# Altium PCB 转接板1ASCII.PcbDoc
Units mm, origin at the board's own origin, x right, y up, seen from the top; angles counter-clockwise.
Board outline 46 x 46 mm, 2 copper layers (Top Layer, Bottom Layer); 5 components, 7 nets, 54 pads, 0 vias.
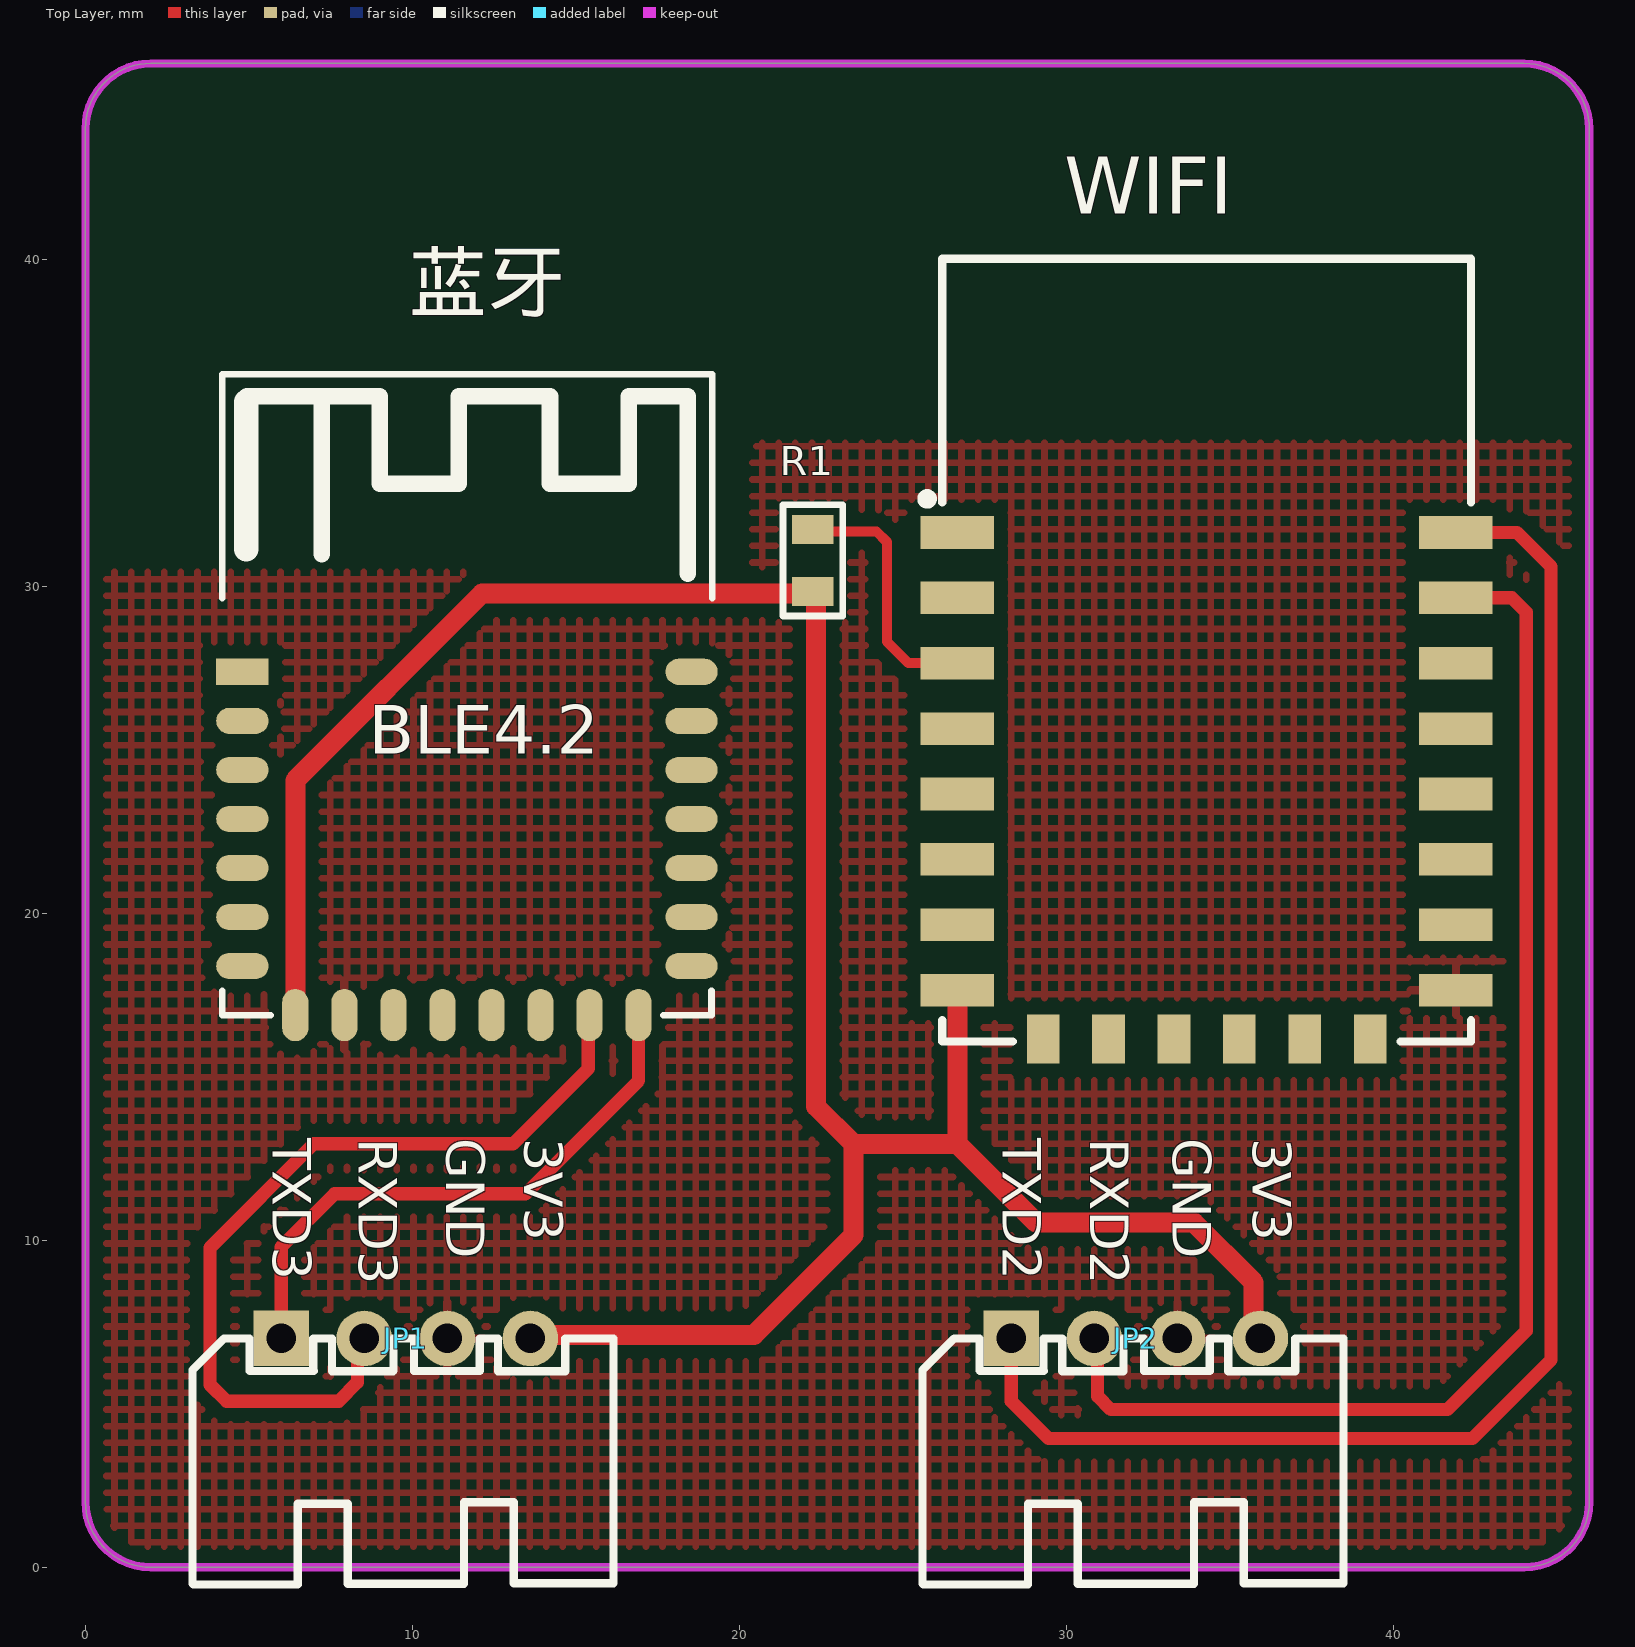
[diagram p0: Top Layer view]
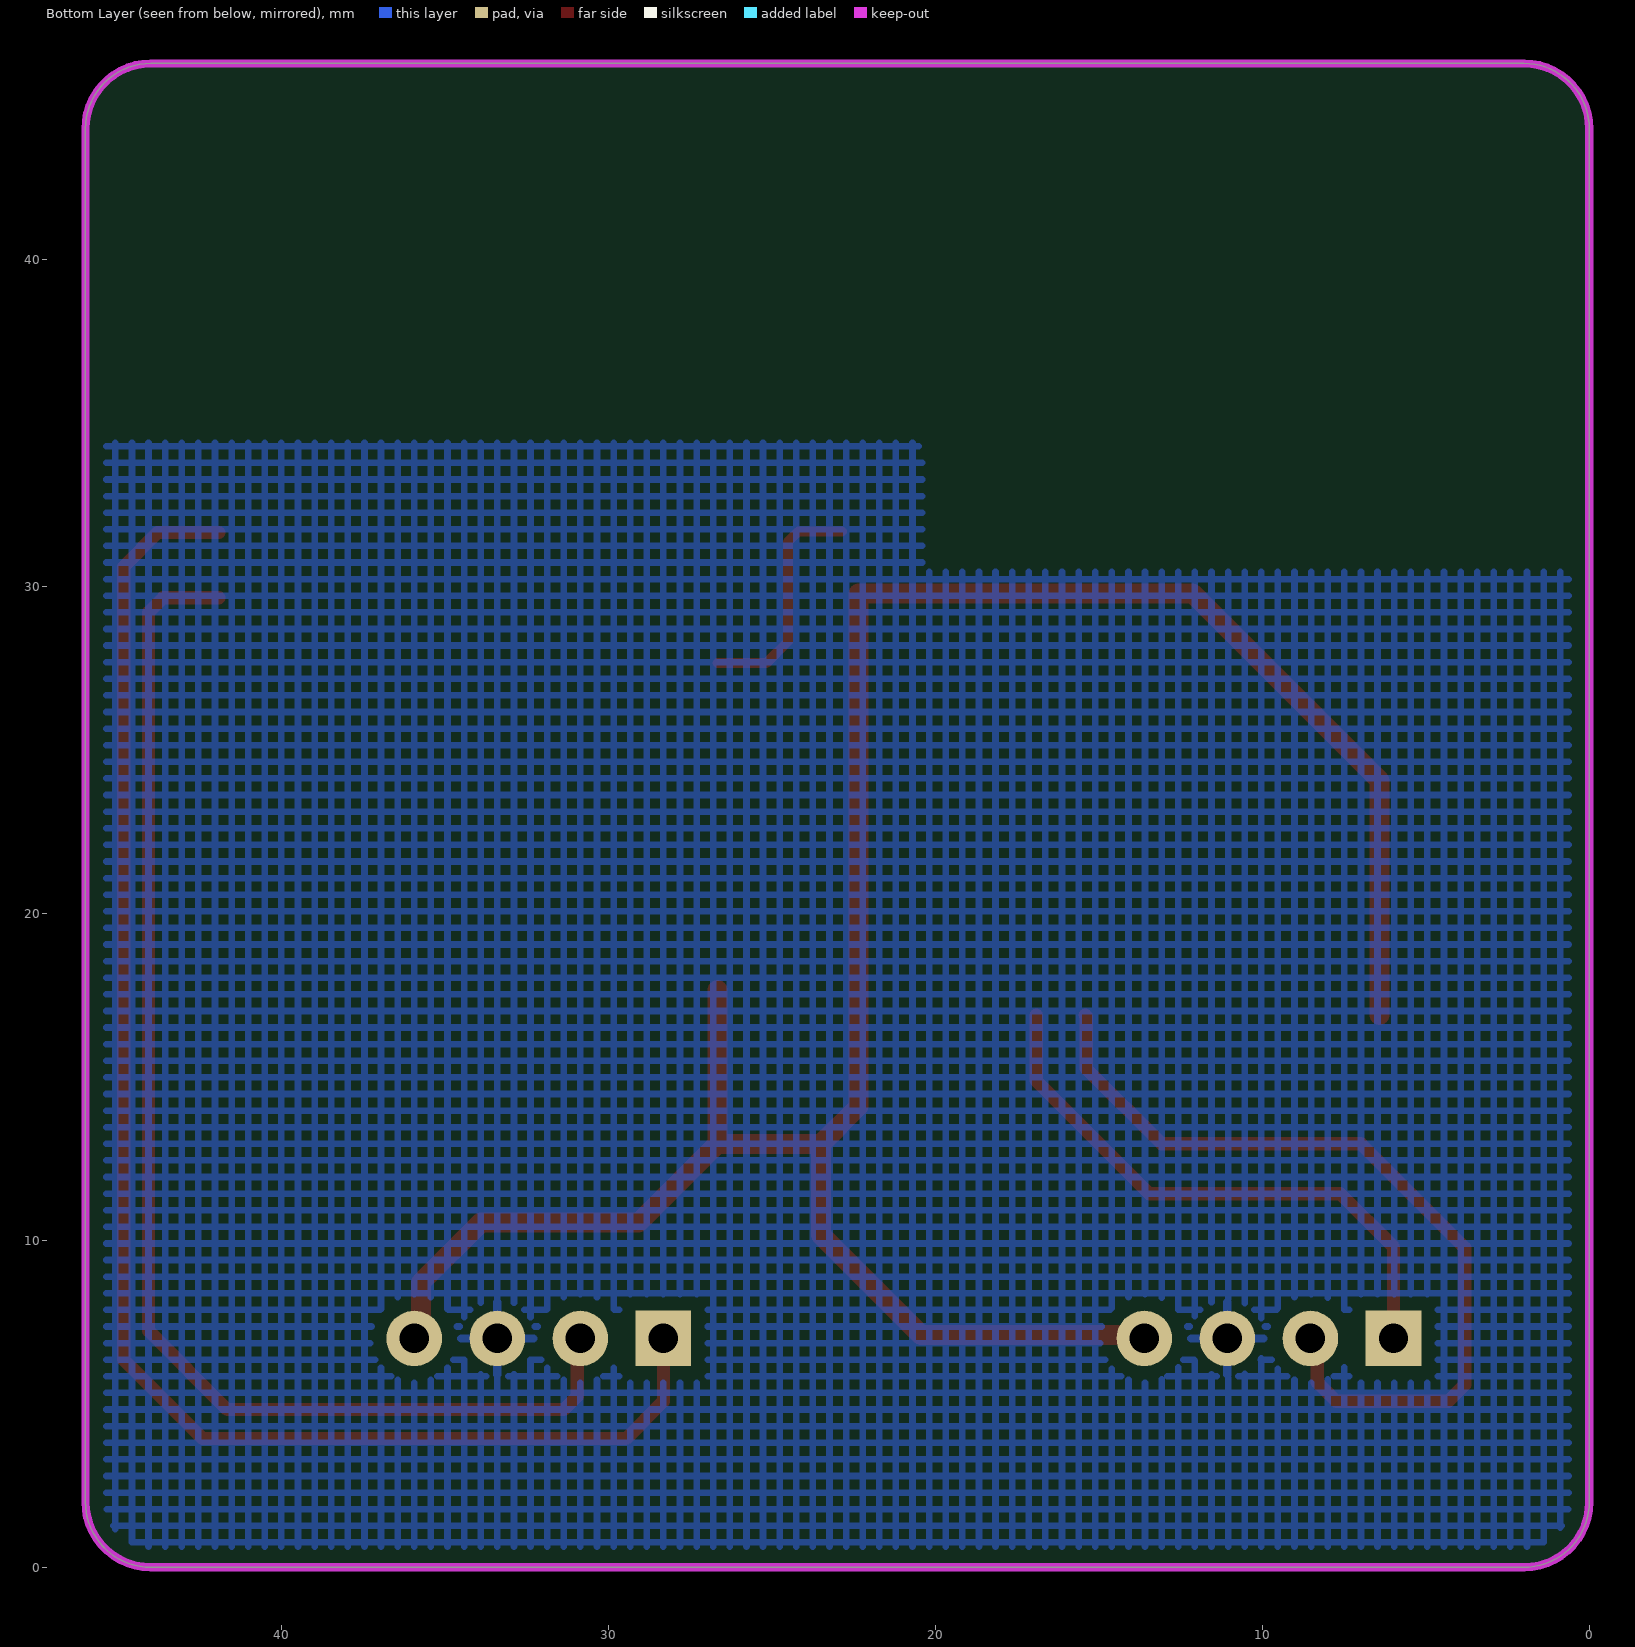
[diagram p1: Bottom Layer view, seen from below]

## Layer stack, top to bottom
Top Solder: solder mask 0.0102, Solder Resist, Dk 3.5
Top Layer: signal copper 0.0356
Dielectric 1: dielectric 0.32, FR-4, Dk 4.8
Bottom Layer: signal copper 0.0356
Bottom Solder: solder mask 0.0102, Solder Resist, Dk 3.5

## Board outline
0,2 ccw(c2,2) 2,0 44,0 ccw(c44,2) 46,2 46,44 ccw(c44,44) 44,46 2,46 ccw(c2,44) 0,44

## Design rules (kind name [scope] priority, off if disabled: settings)
AssemblyTestPointUsage [All] p0: scope1count=1 scope1_0_kind=Board scope1_0_value=Board scope2count=1 scope2_0_kind=Board scope2_0_value=Board commentlength=0
AssemblyTestpoint [All] p0: scope1count=1 scope1_0_kind=Board scope1_0_value=Board scope2count=1 scope2_0_kind=Board scope2_0_value=Board commentlength=0
Clearance Clearance_1 [All] p0 off: scope1count=1 scope1_0_kind=Board scope1_0_value=Board scope2count=1 scope2_0_kind=Board scope2_0_value=Board commentlength=48 gap=0.406 // Protel DXP Scope 1 Expression Was: InPolygon
Clearance [All] p0: scope1count=1 scope1_0_kind=Board scope1_0_value=Board scope2count=1 scope2_0_kind=Board scope2_0_value=Board commentlength=0 gap=0.203
Clearance Clearance_1 [InPolygon] p1: gap=0.406 ignorepadtopadclearanceinfootprint=FALSE
Clearance [All] p2: gap=0.203 ignorepadtopadclearanceinfootprint=FALSE
ComponentClearance [All] p0: scope1count=1 scope1_0_kind=Board scope1_0_value=Board scope2count=1 scope2_0_kind=Board scope2_0_value=Board commentlength=0 gap=0.254 collisioncheckmode=3
DiffPairsRouting [All] p0: scope1count=1 scope1_0_kind=Board scope1_0_value=Board scope2count=1 scope2_0_kind=Board scope2_0_value=Board commentlength=0
FabricationTestPointUsage [All] p0: scope1count=1 scope1_0_kind=Board scope1_0_value=Board scope2count=1 scope2_0_kind=Board scope2_0_value=Board commentlength=0 valid=0 allowmultiple=FALSE
FabricationTestpoint [All] p0: scope1count=1 scope1_0_kind=Board scope1_0_value=Board scope2count=1 scope2_0_kind=Board scope2_0_value=Board commentlength=0 side=3 testpointundercomponent=TRUE minsize=1.016 maxsize=2.54 preferedsize=1.524 minholesize=0 maxholesize=1.016 preferedholesize=0.813 testpointgrid=0.025
FanoutControl Fanout_BGA [All] p0 off: scope1count=1 scope1_0_kind=Board scope1_0_value=Board scope2count=1 scope2_0_kind=Board scope2_0_value=Board commentlength=69 // Protel DXP Scope 1 Expression Was: IsBGA   Fanout_BGA (Default Rule)
FanoutControl Fanout_LCC [All] p0 off: scope1count=1 scope1_0_kind=Board scope1_0_value=Board scope2count=1 scope2_0_kind=Board scope2_0_value=Board commentlength=69 // Protel DXP Scope 1 Expression Was: IsLCC   Fanout_LCC (Default Rule)
FanoutControl Fanout_SOIC [All] p0 off: scope1count=1 scope1_0_kind=Board scope1_0_value=Board scope2count=1 scope2_0_kind=Board scope2_0_value=Board commentlength=71 // Protel DXP Scope 1 Expression Was: IsSOIC   Fanout_SOIC (Default Rule)
FanoutControl Fanout_Small [All] p0 off: scope1count=1 scope1_0_kind=Board scope1_0_value=Board scope2count=1 scope2_0_kind=Board scope2_0_value=Board commentlength=84 // Protel DXP Scope 1 Expression Was: (CompPinCount < 5)   Fanout_Small (Default Rule)
FanoutControl Fanout_Default [All] p0: scope1count=1 scope1_0_kind=Board scope1_0_value=Board scope2count=1 scope2_0_kind=Board scope2_0_value=Board commentlength=30 // Fanout_Default (Default Rule)
Height [All] p0: scope1count=1 scope1_0_kind=Board scope1_0_value=Board scope2count=1 scope2_0_kind=Board scope2_0_value=Board commentlength=0
HoleSize [All] p0: scope1count=1 scope1_0_kind=Board scope1_0_value=Board scope2count=1 scope2_0_kind=Board scope2_0_value=Board commentlength=0 absolutevalues=TRUE maxlimit=2.54 minlimit=0.025 maxpercent=80.000 minpercent=20.000
HoleToHoleClearance [All] p0: scope1count=1 scope1_0_kind=Board scope1_0_value=Board scope2count=1 scope2_0_kind=Board scope2_0_value=Board commentlength=0
LayerPairs [All] p0: scope1count=1 scope1_0_kind=Board scope1_0_value=Board scope2count=1 scope2_0_kind=Board scope2_0_value=Board commentlength=0 enforce=TRUE
MinimumSolderMaskSliver [All] p0: scope1count=1 scope1_0_kind=Board scope1_0_value=Board scope2count=1 scope2_0_kind=Board scope2_0_value=Board commentlength=0
NetAntennae [All] p0: scope1count=1 scope1_0_kind=Board scope1_0_value=Board scope2count=1 scope2_0_kind=Board scope2_0_value=Board commentlength=0
PasteMaskExpansion [All] p0: scope1count=1 scope1_0_kind=Board scope1_0_value=Board scope2count=1 scope2_0_kind=Board scope2_0_value=Board commentlength=0 expansion=0
PlaneClearance [All] p0: scope1count=1 scope1_0_kind=Board scope1_0_value=Board scope2count=1 scope2_0_kind=Board scope2_0_value=Board commentlength=0 clearance=0.508
PlaneConnect [All] p0: scope1count=1 scope1_0_kind=Board scope1_0_value=Board scope2count=1 scope2_0_kind=Board scope2_0_value=Board commentlength=0 planeconnectstyle=Relief reliefexpansion=0.508 reliefentries=4 reliefconductorwidth=0.254 reliefairgap=0.254
PolygonConnect [All] p0: scope1count=1 scope1_0_kind=Board scope1_0_value=Board scope2count=1 scope2_0_kind=Board scope2_0_value=Board commentlength=0 connectstyle=Relief reliefconductorwidth=0.254 reliefentries=4 polygonreliefangle="90 Angle"
PolygonConnect [All] p1: connectstyle=Relief reliefconductorwidth=0.254 reliefentries=4 polygonreliefangle="90 Angle" airgapwidth=0.254
RoutingCorners [All] p0: scope1count=1 scope1_0_kind=Board scope1_0_value=Board scope2count=1 scope2_0_kind=Board scope2_0_value=Board commentlength=0 cornerstyle=45-Degree minsetback=2.54 maxsetback=2.54
RoutingLayers [All] p0: scope1count=1 scope1_0_kind=Board scope1_0_value=Board scope2count=1 scope2_0_kind=Board scope2_0_value=Board commentlength=0 top layer=Automatic bottom layer=Automatic
RoutingPriority [All] p0: scope1count=1 scope1_0_kind=Board scope1_0_value=Board scope2count=1 scope2_0_kind=Board scope2_0_value=Board commentlength=0
RoutingTopology [All] p0: scope1count=1 scope1_0_kind=Board scope1_0_value=Board scope2count=1 scope2_0_kind=Board scope2_0_value=Board commentlength=0 topology=Shortest
RoutingVias [All] p0: scope1count=1 scope1_0_kind=Board scope1_0_value=Board scope2count=1 scope2_0_kind=Board scope2_0_value=Board commentlength=0 holewidth=0.711 width=1.27 viastyle="Through Hole" minholewidth=0.711 minwidth=1.27 maxholewidth=0.711 maxwidth=1.27
RoutingVias [All] p1: holewidth=0.711 width=1.27 viastyle="Through Hole" minholewidth=0.711 minwidth=1.27 maxholewidth=0.711 maxwidth=1.27
ShortCircuit [All] p0: scope1count=1 scope1_0_kind=Board scope1_0_value=Board scope2count=1 scope2_0_kind=Board scope2_0_value=Board commentlength=0 allowed=FALSE
SilkToBoardRegionClearance [All] p0: scope1count=1 scope1_0_kind=Board scope1_0_value=Board scope2count=1 scope2_0_kind=Board scope2_0_value=Board commentlength=0
SilkToSilkClearance [All] p0: scope1count=1 scope1_0_kind=Board scope1_0_value=Board scope2count=1 scope2_0_kind=Board scope2_0_value=Board commentlength=0
SilkToSolderMaskClearance [All] p0 off: scope1count=1 scope1_0_kind=Board scope1_0_value=Board scope2count=1 scope2_0_kind=Board scope2_0_value=Board commentlength=44 // Protel DXP Scope 1 Expression Was: IsPad
SolderMaskExpansion [All] p0: scope1count=1 scope1_0_kind=Board scope1_0_value=Board scope2count=1 scope2_0_kind=Board scope2_0_value=Board commentlength=0 expansion=0.102
SolderMaskExpansion [All] p1: expansion=0.102
UnRoutedNet [All] p0: scope1count=1 scope1_0_kind=Board scope1_0_value=Board scope2count=1 scope2_0_kind=Board scope2_0_value=Board commentlength=0
UnpouredPolygon [All] p0: scope1count=1 scope1_0_kind=Board scope1_0_value=Board scope2count=1 scope2_0_kind=Board scope2_0_value=Board commentlength=0
Width [All] p0: scope1count=1 scope1_0_kind=Board scope1_0_value=Board scope2count=1 scope2_0_kind=Board scope2_0_value=Board commentlength=0 maxlimit=2.032 minlimit=0.152 preferedwidth=0.254
Width [All] p1: maxlimit=2.032 minlimit=0.152 preferedwidth=0.254
30 further rules are at their usual default settings.

## Components (designator, comment, footprint, x,y, rotation, side; value= is the part's Value field where it differs from the comment)
JP1 "HDR-1X4" XH2.54-WI-4P 9.8,7 r0 top
JP2 "HDR-1X4" XH2.54-WI-4P 32.131,7 r0 top
R1 "10K" "R 0805_L" 22.25,30.8 r270 top
WIFI "ESP8266-12E" ESP_12E 26.295,31.654 r0 top
蓝牙 "TLSR8266蓝牙模块" TLSR8266蓝牙4.2 3.8,18.391 r0 top

## Footprints (in the part's own frame and the unit in brackets; to place one, negate y for a bottom-side part, rotate by r counter-clockwise, add the part's x,y. Pads: shape width x height; smd on the part's side, far side on the other; paste and mask are expansions set on the pad)
ESP_12E [mm] "ESP-12 Wi-Fi Module by AI-Thinker"
  rect 2.25x1 smd: 1(0.375,0) 2(0.375,-2) 3(0.375,-4) 4(0.375,-6) 5(0.375,-8) 6(0.375,-10) 7(0.375,-12) 8(0.375,-14) 15(15.625,-14) 16(15.625,-12) 17(15.625,-10) 18(15.625,-8) 19(15.625,-6) 20(15.625,-4) 21(15.625,-2) 22(15.625,0)
  rect 1x1.5 smd: 9(3,-15.5) 10(5,-15.5) 11(7,-15.5) 12(9,-15.5) 13(11,-15.5) 14(13,-15.5)
  silkscreen extent -0.7,-15.57 16.08,8.37
"R 0805_L" [mil] "1/8W贴片电阻"
  rect 35x50 smd: 1(-37.4,0) 2(37.4,0)
  silkscreen extent -67,-36 67,36
TLSR8266蓝牙4.2 [mm]
  rect 1.6x0.8 smd: 1(1,9)
  oval 1.6x0.8 smd: 2(1,7.5) 3(1,6) 4(1,4.5) 5(1,3) 6(1,1.5) 7(1,0) 17(14.74,1.5) 18(14.74,3) 19(14.74,4.5) 20(14.74,6) 21(14.74,7.5) 22(14.74,9) 23(14.74,0)
  oval 0.8x1.6 smd: 8(2.62,-1.5) 9(4.12,-1.5) 10(5.62,-1.5) 11(7.12,-1.5) 12(8.62,-1.5) 13(10.12,-1.5) 14(11.62,-1.5) 15(13.12,-1.5)
  silkscreen extent 0.39,-1.5 15.37,18.1
XH2.54-WI-4P [mm] "接插件，4P"
  rect 1.7x1.7 hole 0.9: 1(-3.81,0)
  round 1.7 hole 0.9: 2(-1.27,0) 3(1.27,0) 4(3.81,0)
  silkscreen extent -6.53,-7.53 6.35,0

## Part data
JP1 JP2: library part "Header 4", "4P接插件"
R1: library part R, "贴片电阻"
WIFI: "串口 WIFI模块，ESP-12E"

## Nets (pads, with @x,y where several pads share a name; then routed paths per layer and width w, separated by ;. In a path a pad name is that pad's centre, name@x,y a point inside that pad or via, vN(x,y) a via of type N, cw(c..) or ccw(c..) an arc to the next point about the centre after c; other vN are vias at no path point)
+3.3: JP1.4 JP2.4 R1.2 WIFI.8 蓝牙.8 | length 77.3
  Top Layer w0.61: 蓝牙.8 6.42,24.073 12.131,29.784 22.35,29.784 22.35,14.099 23.495,12.954 ; JP1.4 13.722,7.112 20.447,7.112 23.495,10.16 23.495,12.954 ; WIFI.8 26.67,12.954 ; JP2.4 35.732,7.209 35.732,8.718 33.909,10.541 29.083,10.541 26.67,12.954 ; 23.495,12.954 26.67,12.954
GND: JP1.3 JP2.3 WIFI.15 蓝牙.9
NetJP1_1: JP1.1 蓝牙.15 | length 17.8
  Top Layer w0.406: JP1.1 5.99,9.8 7.62,11.43 13.462,11.43 16.92,14.888 蓝牙.15
NetJP1_2: JP1.2 蓝牙.14 | length 26.1
  Top Layer w0.406: JP1.2 8.321,6.791 8.321,5.654 7.747,5.08 4.318,5.08 3.81,5.588 3.81,9.779 6.985,12.954 13.081,12.954 15.384,15.257 15.384,16.855 蓝牙.14
NetJP2_1: JP2.1 WIFI.22 | length 47.5
  Top Layer w0.406: JP2.1 28.321,5.08 29.464,3.937 42.418,3.937 44.831,6.35 44.831,30.607 43.784,31.654 WIFI.22
NetJP2_2: JP2.2 WIFI.21 | length 40.4
  Top Layer w0.406: JP2.2 30.959,6.902 30.959,5.236 31.369,4.826 41.656,4.826 44.069,7.239 44.069,29.21 43.625,29.654 WIFI.21
NetR1_1: R1.1 WIFI.3 | length 7.3
  Top Layer w0.305: R1.1@22.86,31.684 24.196,31.684 24.511,31.369 24.511,28.321 25.178,27.654 WIFI.3
pads on no net: WIFI.1 WIFI.2 WIFI.4 WIFI.5 WIFI.6 WIFI.7 WIFI.9 WIFI.10 WIFI.11 WIFI.12 WIFI.13 WIFI.14 WIFI.16 WIFI.17 WIFI.18 WIFI.19 WIFI.20 蓝牙.1 蓝牙.2 蓝牙.3 蓝牙.4 蓝牙.5 蓝牙.6 蓝牙.7 蓝牙.10 蓝牙.11 蓝牙.12 蓝牙.13 蓝牙.17 蓝牙.18 蓝牙.19 蓝牙.20 蓝牙.21 蓝牙.22 蓝牙.23

## Polygon pours and split planes (outlines as drawn)
GND on Bottom Layer "GND_L02_P000" (hatched 90Degree grid 0.508 track 0.203, pour order 0): 44.7,0 46,1.3 46,34.4 20.625,34.4 20.4,34.175 20.4,30.6 20.25,30.45 0,30.45 0,1.175 1.175,0
GND on Top Layer "GND_L01_P001" (hatched 90Degree grid 0.508 track 0.203, pour order 1): 44.7,0 46,1.3 46,34.4 20.625,34.4 20.4,34.175 20.4,30.6 20.25,30.45 0,30.45 0,1.175 1.175,0

## Keep-outs
Keep-Out Layer:
  the board outline again, w0.254

## Silkscreen, mask and mechanical layers (free items; w line width, h text height)
Top Overlay:
  text "TXD3" at 5.347,13.125 h2 r270
  text "RXD3" at 7.972,13.125 h2 r270
  text "GND" at 10.647,13.125 h2 r270
  text "3V3" at 13.047,13.125 h2 r270
  text "TXD2" at 27.675,13.125 h2 r270
  text "RXD2" at 30.35,13.125 h2 r270
  text "GND" at 32.872,13.125 h2 r270
  text "3V3" at 35.322,13.125 h2 r270
Mechanical 1:
  the board outline again, w0.254

## Text inside footprints (layer, text, board x,y; h text height)
JP2: Mechanical 13 "CUTOUT POLYGON" at 26.422,39.02 h0.25
WIFI: Mechanical 13 "ANTENNA AREA" at 26.422,39.528 h0.25
蓝牙: Top Overlay "BLE4.2" at 8.67,24.391 h2.54